# Altium PCB 1st_week.PcbDoc
Units mil, origin at the board's own origin, x right, y up, seen from the top; angles counter-clockwise.
Board outline 1795.01 x 1150.03 mil, 2 copper layers (Top Layer, Bottom Layer); 8 components, 4 nets, 21 pads, 0 vias.
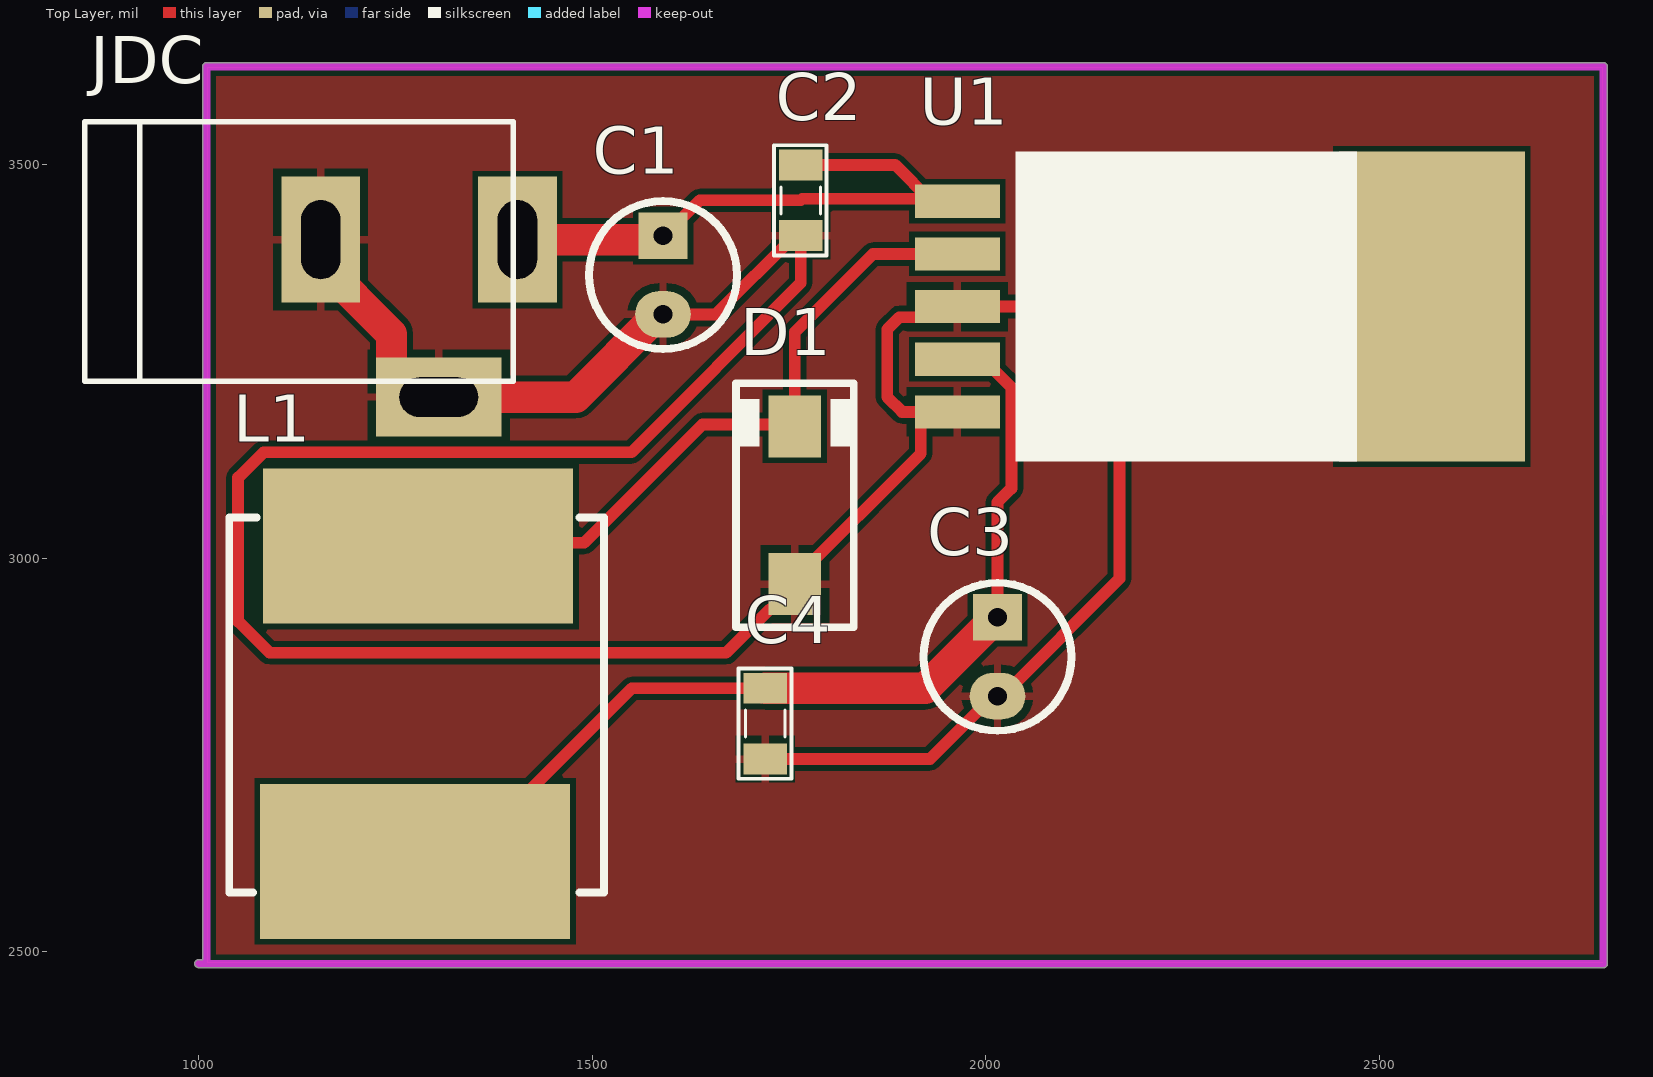
[diagram p0: Top Layer view]
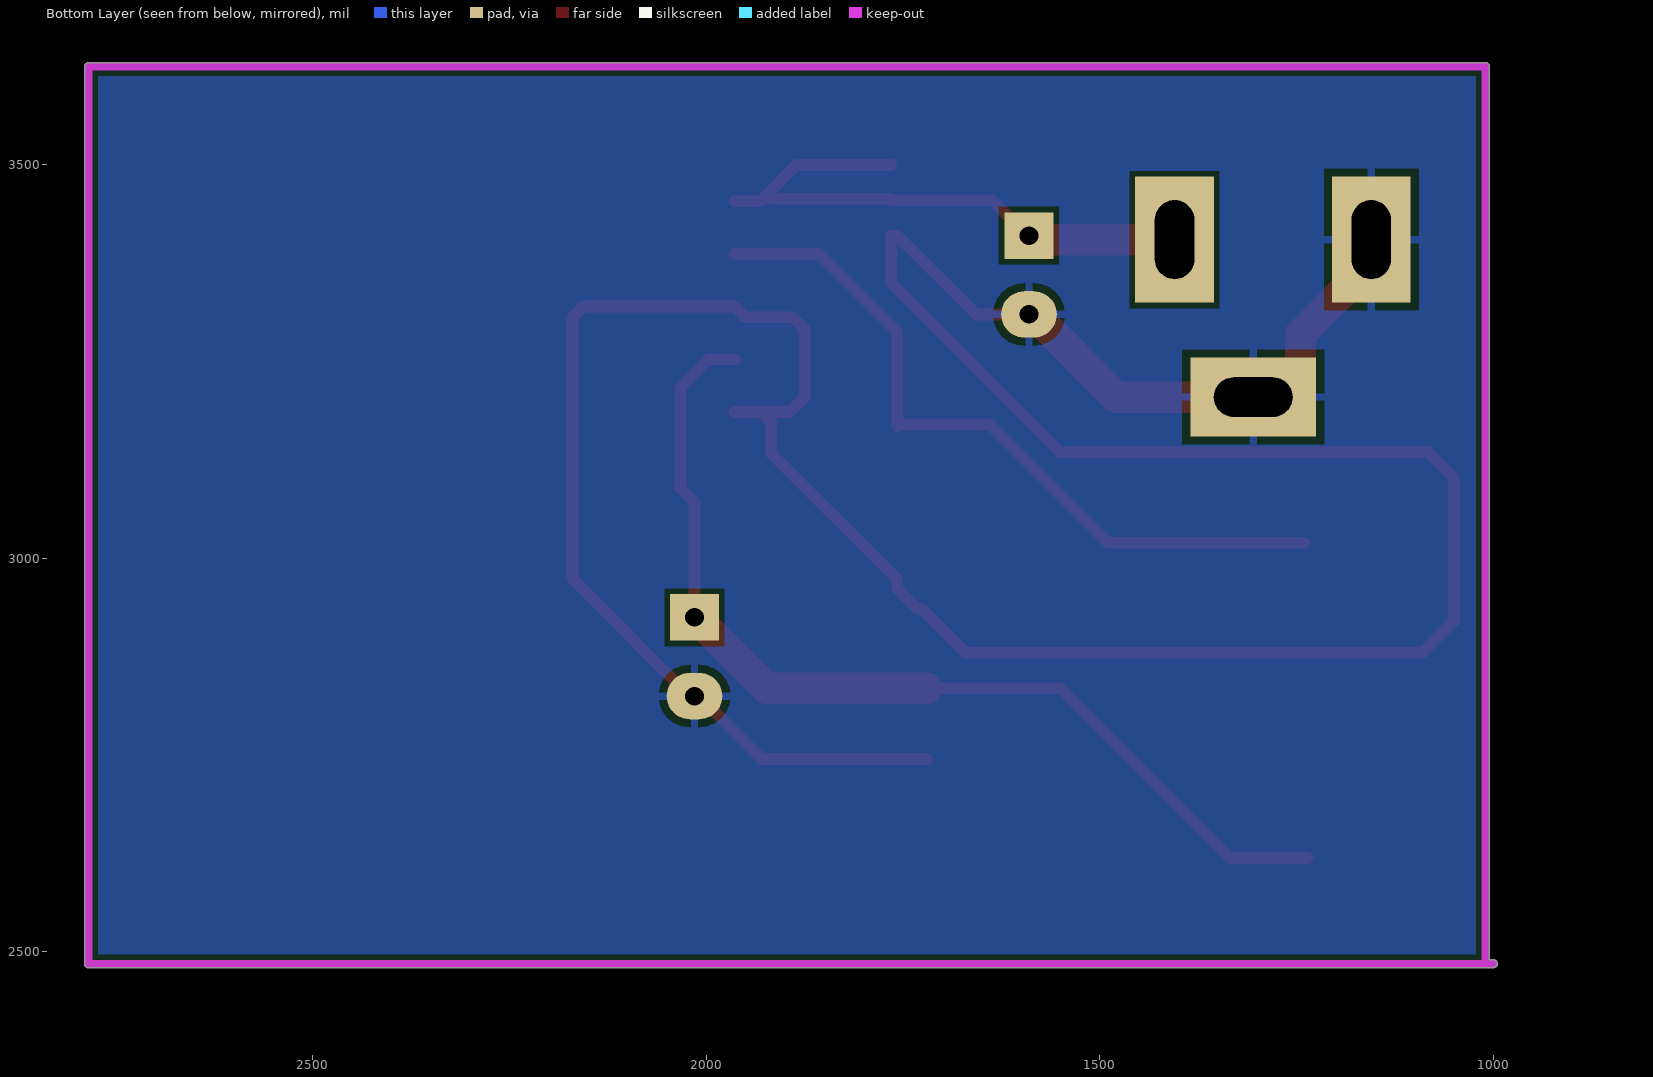
[diagram p1: Bottom Layer view, seen from below]
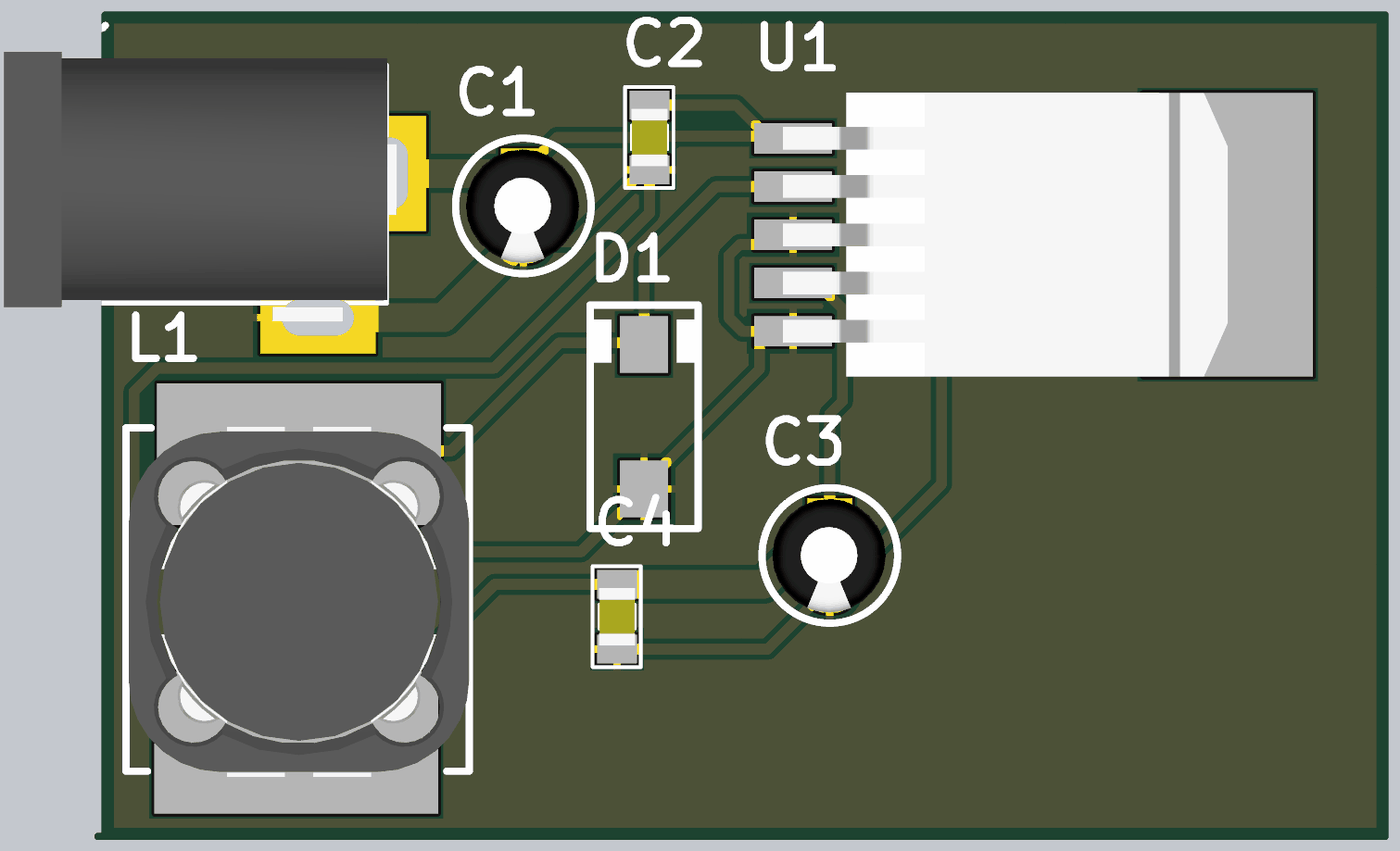
[diagram p2: 3D render of the assembled board from above, using the file's embedded part models]

## Layer stack, top to bottom
Top Solder: solder mask 0.4, Solder Resist, Dk 3.5
Top Layer: signal copper 1.4
Dielectric 1: dielectric 12.6, FR-4, Dk 4.8
Bottom Layer: signal copper 1.4
Bottom Solder: solder mask 0.4, Solder Resist, Dk 3.5

## Board outline
1000,2479.99 cw(c1000,2485) 1000,2490.01 1004.99,2490.01 1004.99,3625 cw(c1010,3625) 1010,3630.01 2785,3630.01 cw(c2785,3625) 2790.01,3625 2790.01,2485 cw(c2785,2485) 2785,2479.99

## Design rules (kind name [scope] priority, off if disabled: settings)
Clearance [All] p1: gap=7 ignorepadtopadclearanceinfootprint=TRUE
PolygonConnect [All] p1: connectstyle=Relief reliefconductorwidth=10 reliefentries=4 polygonreliefangle="90 Angle" airgapwidth=10
RoutingVias [All] p1: holewidth=14 width=30 viastyle="Through Hole" minholewidth=148 minwidth=30 maxholewidth=28 maxwidth=50
SolderMaskExpansion [All] p1: expansion=4 istentingtop=FALSE
Width [All] p1: maxlimit=40 minlimit=7 preferedwidth=15
30 further rules are at their usual default settings.

## Components (designator, comment, footprint, x,y, rotation, side; value= is the part's Value field where it differs from the comment)
C1 "330 uF 10 V" CA-ALU-2.54 1590,3360 r270 top value=104
C2 "Capacitor Ceramic" CAP_0805 1765,3455 r270 top value=104
C3 "660 uF 18 V" CA-ALU-2.54 2015,2875 r270 top value=104
C4 "Capacitor Ceramic" CAP_0805 1720,2790 r270 top value=104
D1 "1N5822" SMA 1757.5,3067.5 r90 top value="Diode c?m 1N5408"
JDC "Jac DC" DC-IN 1280,3305 r0 top
L1 "150mH" Inductor_SMD 1038.78,2575.63 r0 top value="150 mH"
U1 "LM2976" TO263-5 1965,3320 r270 top

## Footprints (in the part's own frame and the unit in brackets; to place one, negate y for a bottom-side part, rotate by r counter-clockwise, add the part's x,y. Pads: shape width x height; smd on the part's side, far side on the other; paste and mask are expansions set on the pad)
CA-ALU-2.54 [mm]
  rect 1.5x1.58 hole 0.6: 1(-1.27,0)
  oval 1.5x1.8 hole 0.6: 2(1.27,0)
  silkscreen extent -2.39,-2.39 2.39,2.39, body extent -2,-2.03 1.99,1.97, height 7.01
CAP_0805 [mil]
  rect 39.37x55 smd: 1(-45,0) 2(45,0)
  silkscreen extent -70,-34 70,33, body extent -40,-25 40,25, height 24
DC-IN [mil] "Jac DC input"
  rect 100x160 hole 50 slot 100 at 90 deg: 1(125,100) 2(-125,100)
  rect 160x100 hole 50 slot 100 at 0 deg: 3(25,-100)
  silkscreen extent -425,-80 120,250, body extent -410,-105 134,269, height 434
Inductor_SMD [mm]
  rect 10x5 smd: 1(6.096,11.176) 2(6,1)
  silkscreen extent 0,0 12.1,12.1, body extent 0.1,-0.2 12.1,12.14, height 7.15
SMA [mm]
  rect 2x1.7 smd: 1(-2.544,0) 2(2.544,0)
  silkscreen extent -3.94,-1.9 3.94,1.91, body extent -2.87,-1.4 2.87,1.4, height 2.29
TO263-5 [mm] "LM2576-SMD"
  rect 1.07x2.75 smd: 1(-3.4,-0.025) 2(-1.7,-0.025) 3(0,-0.025) 4(1.7,-0.025) 5(3.4,-0.025)
  rect 10x6 smd: 6(0,15.289)
  silkscreen extent -5,1.85 5,12.88, body extent -5,-0.38 5,15.29, height 4.79

## Part data
C1 C3: library part CAP-ALU-DIP, "Capacitor (Semiconductor SIM Model)", LatestRevisionDate=17-Jul-2002, LatestRevisionNote="Re-released for DXP Platform.", PackageReference=C1206, Publisher="Altium Limited"
C2 C4: library part CapCeramic, "Capacitor", LatestRevisionDate=17-Jul-2002, LatestRevisionNote="Re-released for DXP Platform.", PackageReference=RAD-0.3, Published=8-Jun-2000, Publisher="Altium Limited"
D1: "Schottky Rectifiers"
JDC: library part DCIN, "Jac DC input"
L1: library part L1, "Inductor"
U1: library part LM2596, Max Input Voltage="12 V", Max Output Current="3 (6.0 peak) A", Max Output Voltage=mV, Temperature Range="-40 to +125 degC", Category=IC-Power, Min Input Voltage=mV, Min Output Voltage=mV, Mounting Technology="Surface Mount", Status=Unreleased, Supply Voltage=mV

## Nets (pads, with @x,y where several pads share a name; then routed paths per layer and width w, separated by ;. In a path a pad name is that pad's centre, name@x,y a point inside that pad or via, vN(x,y) a via of type N, cw(c..) or ccw(c..) an arc to the next point about the centre after c; other vN are vias at no path point)
"12 V": C1.1 C2.1 JDC.1 U1.1 | length 741.7
  Top Layer w15: C1.1 1591.57,3410 1636.57,3455 1765,3455 1766.93,3456.93 U1.1@1917.07,3456.93 ; C2.1 1884.79,3500 1930.93,3453.86 U1.1
  Top Layer w40: JDC.1 1575,3405 C1.1@1580,3410
GND: C1.2 C2.2 C3.2 C4.2 D1.1 JDC.2 JDC.3 U1.3 U1.5 | length 4311.7
  Top Layer w15: C1.2 1657.18,3310 1757.19,3410 C2.2 1765,3350 1550,3135 1082.37,3135 1050,3102.63 1050,2920 1090,2880 1670.16,2880 1725.63,2935.47 1731.54,2935.47 1757.5,2961.44 D1.1 1757.5,2973.25 1917.37,3133.11 1917.37,3172.58 U1.5@1930.93,3186.14 ; C4.2 1929.1,2745 2009.09,2825 C3.2 2020.91,2825 2170,2974.09 2170,3306.21 2156.21,3320 U1.3 1950.44,3306.44 1890.22,3306.44 1875,3291.21 1875,3205 1893.86,3186.14 U1.5@1930.93,3186.14 ; U1.5 U1.5@1930.93,3186.14
  Top Layer w40: JDC.2 1155,3375 1245,3285 1245,3235 1275,3205 JDC.3 1479.09,3205 1584.09,3310 C1.2
NetC3_1: C3.1 C4.1 L1.2 U1.4 | length 1288.6
  Top Layer w15: L1.2@1236.22,2619.37 1334.65,2619.37 1550.28,2835 1565,2835 C4.1 ; U1.4 1997.07,3253.07 2032.63,3217.51 2032.63,3088.94 2015,3071.3 C3.1
  Top Layer w40: C4.1 1923.43,2835 2013.43,2925 C3.1
NetD1_2: D1.2 L1.1 U1.2 | length 948.1
  Top Layer w15: L1.1@1240,3020 1490,3020 1640,3170 1755.16,3170 D1.2 1757.5,3287.5 1856.93,3386.93 U1.2
pads on no net: U1.6

## Polygon pours and split planes (outlines as drawn)
no net on Top Layer "NONET_L01_P003" (solid, remove dead copper, pour order 3): 2784.08,3623.34 2783.75,3623.67 1010.72,3623.67 1010.72,2486.26 1010.84,2486.14 1011.7,2487 2784.62,2487
GND on Top Layer "GND_L01_P001" (solid, pour order 1): 1008.11,3624.13 2782.86,3624.13 2784.8,3622.19 2784.8,2485.56 1009.94,2485.56 1009.29,2486.21
GND on Bottom Layer "GND_L02_P004" (solid, remove dead copper, pour order 4): 2783.59,3623.65 1010.93,3623.65 1010.99,3623.59 1010.99,2487.2 2783.86,2487.2 2784.15,2487.5

## Keep-outs
Keep-Out Layer:
  lines w10: 1000,2485 2785,2485 2785,3625 2640,3625 1010,3625 1010,2485